# Altium PCB PCB1.PcbDoc
Units mil, origin at the board's own origin, x right, y up, seen from the top; angles counter-clockwise.
Board outline 6000 x 4000 mil, 2 copper layers (Top Layer, Bottom Layer); 3 components, 19 nets, 40 pads, 0 vias.
Unrouted connection lines stored in the file: 1.
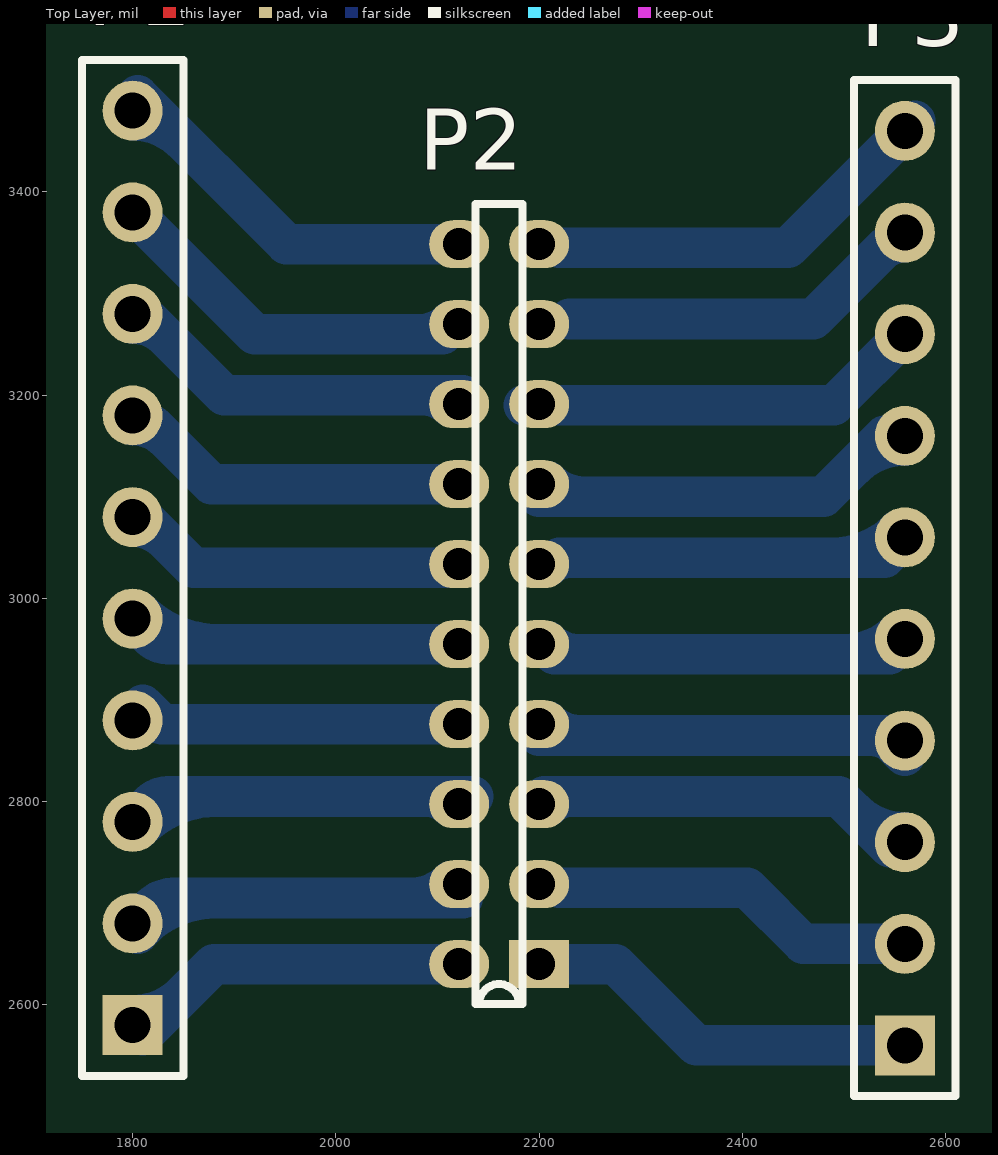
[diagram p0: Top Layer view]
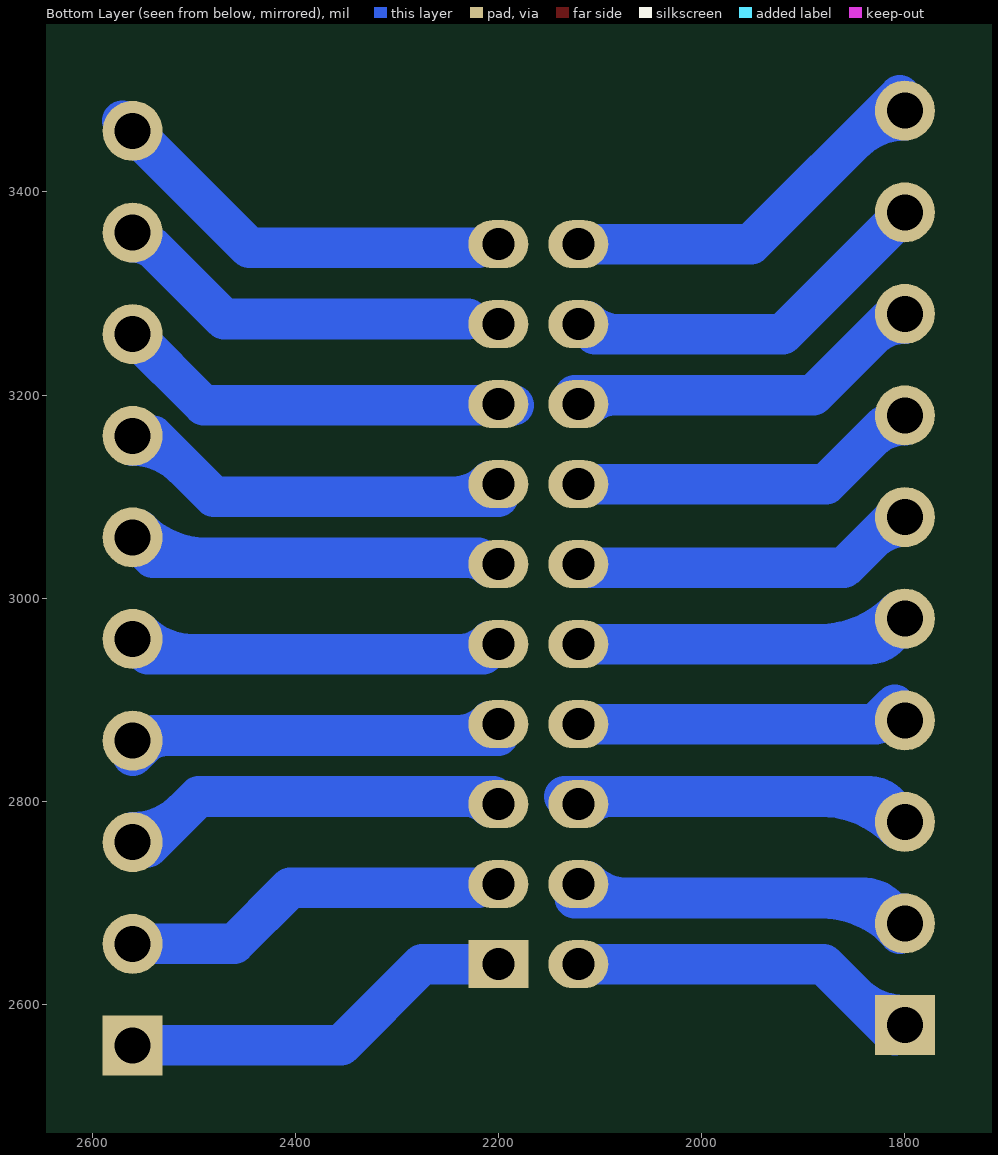
[diagram p1: Bottom Layer view, seen from below]

## Layer stack, top to bottom
Top Layer: signal copper 1.4
Dielectric: dielectric 12.6, FR-4, Dk 4.8
Bottom Layer: signal copper 1.4

## Board outline
1000,1000 7000,1000 7000,5000 1000,5000

## Design rules (kind name [scope] priority, off if disabled: settings)
Clearance [All] p1: gap=10
ComponentClearance [All] p1: gap=10 collisioncheckmode=3 verticalgap=10
PolygonConnect [All] p1: connectstyle=Relief reliefconductorwidth=10 reliefentries=4 polygonreliefangle="90 Angle"
RoutingVias [All] p1: holewidth=28 width=50 viastyle="Through Hole" minholewidth=28 minwidth=50 maxholewidth=28 maxwidth=50
SolderMaskExpansion [All] p1: expansion=4
TestPointUsage [All] p1: valid=0 allowmultiple=FALSE
Testpoint [All] p1: side=15 testpointundercomponent=TRUE minsize=40 maxsize=100 preferedsize=60 minholesize=0 maxholesize=40 preferedholesize=32 testpointgrid=1 style=1023 order=0-112345678
Width [All] p1: maxlimit=50 minlimit=10 preferedwidth=10 minimp=50.000000 maximp=50.000000 favimp=50.000000
18 further rules are at their usual default settings.

## Components (designator, comment, footprint, x,y, rotation, side; value= is the part's Value field where it differs from the comment)
P1 "Header 10" HDR1X10 1800,2580 r90 top
P2 "Header 10X2" "H20X1 2.0" 2200,2640 r180 top
P3 "Header 10" HDR1X10 2560,2560 r90 top

## Footprints (in the part's own frame and the unit in brackets; to place one, negate y for a bottom-side part, rotate by r counter-clockwise, add the part's x,y. Pads: shape width x height; smd on the part's side, far side on the other; paste and mask are expansions set on the pad)
"H20X1 2.0" [mm]
  rect 1.5x1.2 / inner rect 2.5x1.2 / far side rect 1.5x1.2 hole 0.8: 1(0,0)
  oval 1.5x1.2 / inner oval 2.5x1.2 / far side oval 1.5x1.2 hole 0.8: 2(2,0) 3(0,-2) 4(2,-2) 5(0,-4) 6(2,-4) 7(0,-6) 8(2,-6) 9(0,-8) 10(2,-8) 11(0,-10) 12(2,-10) 13(0,-12) 14(2,-12) 15(0,-14) 16(2,-14) 17(0,-16) 18(2,-16) 19(0,-18) 20(2,-18)
  silkscreen extent 0.42,-19 1.58,1
HDR1X10 [mm] "Connector; Header; 10 Position"
  rect 1.5x1.5 hole 0.9: 1(0,0)
  round 1.5 hole 0.9: 2(2.54,0) 3(5.08,0) 4(7.62,0) 5(10.16,0) 6(12.7,0) 7(15.24,0) 8(17.78,0) 9(20.32,0) 10(22.86,0)
  silkscreen extent -1.27,-1.27 24.13,1.27

## Part data
P1: library part "Header 8X2", "Header, 8-Pin, Dual row"
P2: "Header, 10-Pin, Dual row"
P3: "Header, 10-Pin"

## Nets (pads, with @x,y where several pads share a name; then routed paths per layer and width w, separated by ;. In a path a pad name is that pad's centre, name@x,y a point inside that pad or via, vN(x,y) a via of type N, cw(c..) or ccw(c..) an arc to the next point about the centre after c; other vN are vias at no path point)
CAMCLK: P2.5 P3.3 | length 443.7
  Bottom Layer w40: P2.5@2205,2805 2495,2805 P3.3@2545,2755 ; P2.5@2208.47,2794.92 cw(c2232.8,2770.58) 2232.8,2805 ; 2509.59,2790.41 ccw(c2560,2840.81) P3.3@2560,2769.53
CAMDATA0: P1.8 P2.16 | length 408.6
  Bottom Layer w40: P1.8@1800,3270.47 cw(c1800,3223.33) 1833.34,3256.66 ; P1.8@1815,3275 1890,3200 P2.16@2125,3200 ; 2085.32,3200 cw(c2085.32,3161.15) P2.16@2112.79,3188.62
CAMDATA1: P2.15 P3.8 | length 404
  Bottom Layer w40: P2.15@2185,3190 2490,3190 P3.8
CAMDATA2: P1.7 P2.14 | length 362.1
  Bottom Layer w40: P1.7@1800,3170.47 cw(c1800,3123.33) 1833.34,3156.66 ; P1.7@1820,3170 1877.56,3112.44 P2.14
CAMDATA3: P2.13 P3.7 | length 461.1
  Bottom Layer w40: P2.13@2200,3100 2480,3100 P3.7@2540,3160 ; P2.13@2208.47,3115 ccw(c2244.69,3151.22) 2244.69,3100 ; 2509.59,3129.59 cw(c2560,3079.19) P3.7@2560,3150.47
CAMDATA4: P1.6 P2.12 | length 369.8
  Bottom Layer w40: P1.6@1800,3070.47 cw(c1800,3023.33) 1833.34,3056.66 ; P1.6@1805,3085 1860,3030 P2.12@2115,3030
CAMDATA5: P2.11 P3.6 | length 443.7
  Bottom Layer w40: P2.11@2208.47,3031.14 cw(c2229.86,3009.75) 2229.86,3040 ; P2.11@2220,3040 2540,3040 P3.6 ; 2488.71,3040 ccw(c2488.71,3131.29) P3.6@2553.26,3066.74
CAMDATA6: P1.5 P2.10 | length 476.5
  Bottom Layer w40: P1.5@1800,2970.47 cw(c1800,2923.33) 1833.34,2956.66 ; P1.5@1806.74,2986.74 ccw(c1883.45,3063.45) 1883.45,2954.96 ; P1.5@1809.53,2980.13 ccw(c1835.04,2980.47) 1835.04,2954.96 ; P1.5@1815,2975 1835.04,2954.96 ; P2.10 1835.04,2954.96
CAMDATA7: P2.9 P3.5 | length 443.1
  Bottom Layer w40: P2.9@2208.47,2957.52 ccw(c2238.7,2987.75) 2238.7,2945 ; P2.9@2215,2945 2545,2945 P3.5 ; 2500.79,2945 ccw(c2500.79,3019.21) P3.5@2553.26,2966.74
CAMHREF: P1.3 P2.6 | length 517.1
  Bottom Layer w40: P1.3@1800,2789.53 ccw(c1800,2836.67) 1833.34,2803.34 ; P1.3@1806.74,2773.26 cw(c1883.36,2696.64) 1883.36,2805 ; P1.3@1809.53,2779.87 cw(c1835,2779.53) 1835,2805 ; P1.3@1815,2785 1835,2805 ; 2088.46,2805 cw(c2088.46,2770.58) P2.6@2112.79,2794.92 ; P2.6@2135,2805 1835,2805
CAMPCLK: P1.4 P2.8 | length 347.2
  Bottom Layer w40: P1.4@1806.74,2886.74 ccw(c1832.13,2912.13) 1832.13,2876.22 ; P1.4@1810,2895 1828.78,2876.22 P2.8
CAMSYNC: P2.7 P3.4 | length 436.7
  Bottom Layer w40: P2.7@2200,2865 2540,2865 P3.4@2560,2845 ; P2.7@2208.47,2878.78 ccw(c2241.74,2912.05) 2241.74,2865 ; 2524.93,2865 cw(c2524.93,2824.93) P3.4@2553.26,2853.26
GAMSTR: P1.2 P2.4 | length 551.1
  Bottom Layer w40: P1.2@1800.38,2689.52 ccw(c1802.53,2742.47) 1840,2705 ; P1.2@1805,2670 1840,2705 ; P1.2@1806.74,2673.26 cw(c1883.36,2596.64) 1883.36,2705 ; P1.2@1809.43,2678.61 cw(c1840,2674.09) 1840,2705 ; 2073.44,2705 ccw(c2073.44,2760.66) P2.4@2112.79,2721.3 ; P2.4@2125,2705 1840,2705
GND: P1.10 P2.20 | length 432.9
  Bottom Layer w40: P1.10@1800,3470.47 cw(c1800,3399.19) 1850.41,3449.59 ; P1.10@1805,3495 1951.34,3348.66 P2.20
GP14: P2.3 P3.2 | length 362.8
  Bottom Layer w40: P2.3@2220,2715 2405,2715 2460,2660 P3.2
SCK: P1.1 P2.2 | length 396.2
  Bottom Layer w40: P1.1@1800,2589.53 ccw(c1800,2660.81) 1850.41,2610.41 ; P1.1@1810,2570 1880,2640 P2.2
SDA: P2.1 P3.1 | length 393.1
  Bottom Layer w40: P2.1 2275,2640 2355,2560 P3.1
VDD1.8: P2.19 P3.10 | length 401.8
  Bottom Layer w40: P2.19@2220,3345 2445,3345 P3.10@2570,3470
VDD33: P1.9 P2.17 P2.18 P3.9 | length 740.6
  Bottom Layer w40: P1.9@1810,3370 1920,3260 P2.18@2105,3260 ; 2082.66,3260 ccw(c2082.66,3302.62) P2.18@2112.79,3272.48 ; 2230,3275 2470,3275 P3.9@2540,3345 ; 2535.2,3340.2 cw(c2560,3315.4) P3.9@2560,3350.47